# EAGLE board hero_board (EAGLE 9.2.2)
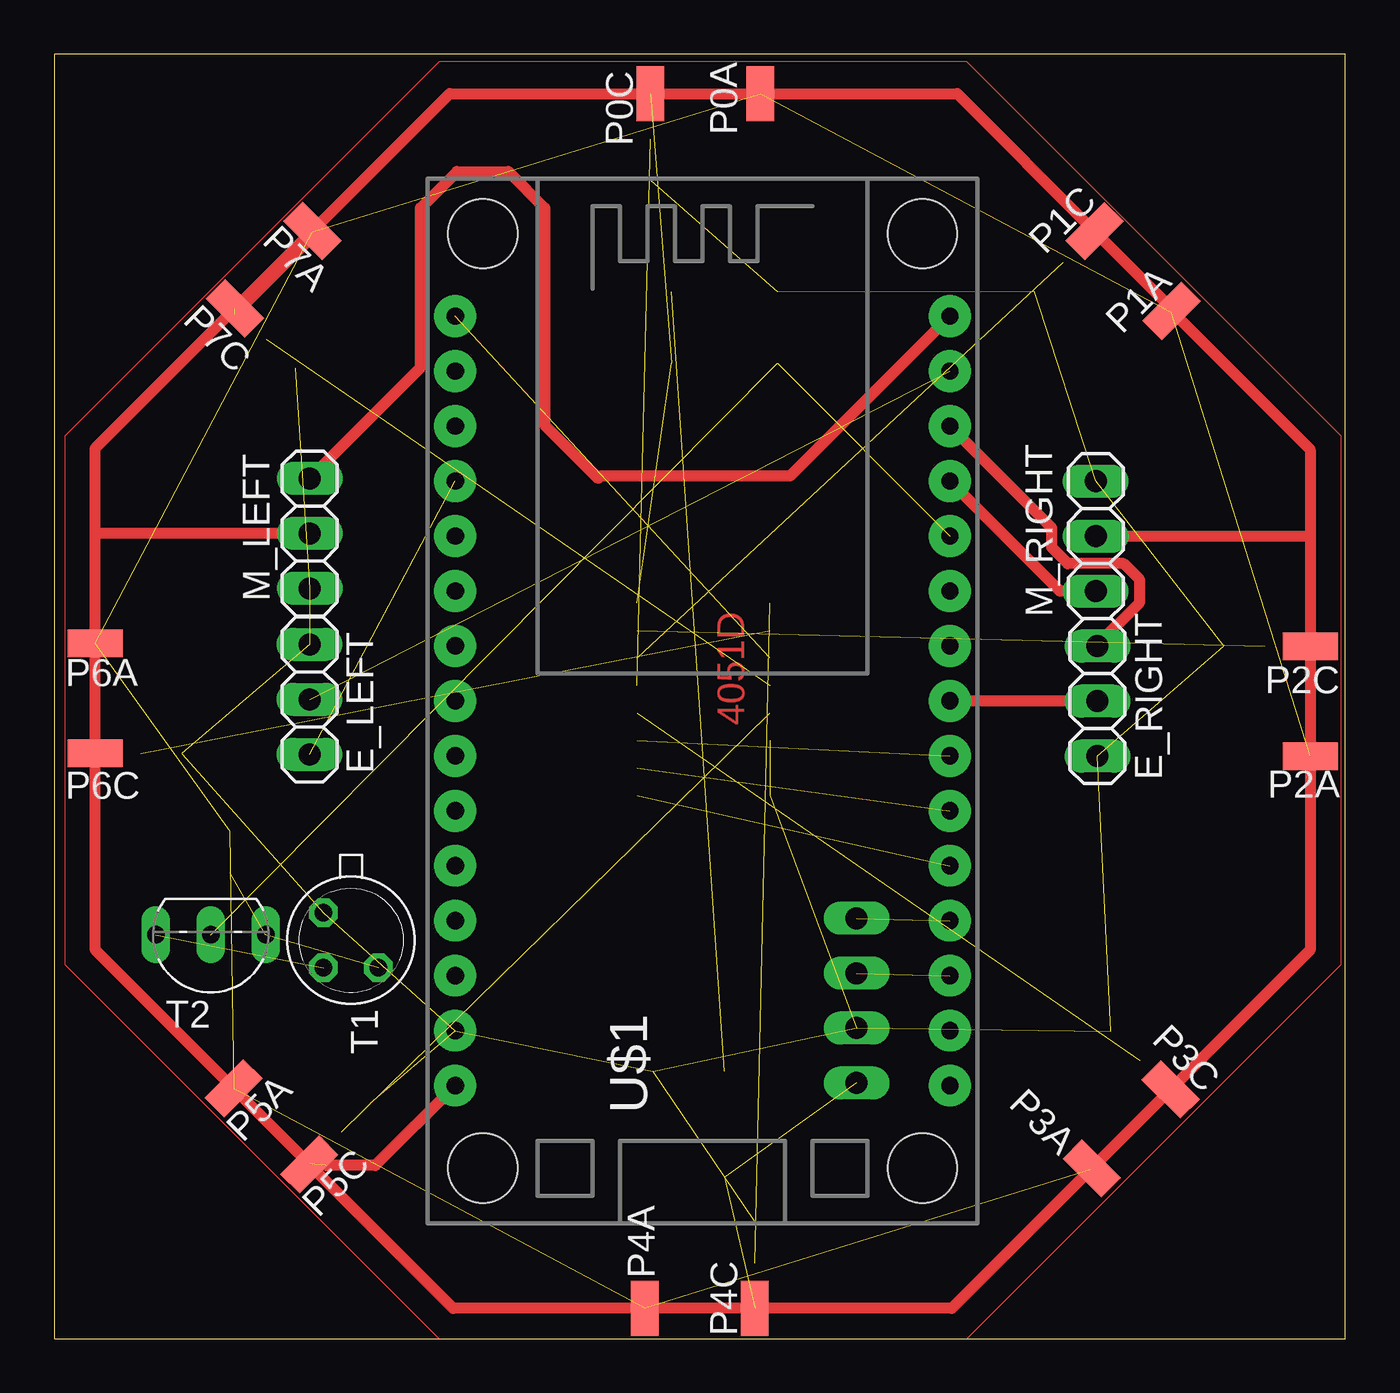
[diagram p0: board, top side]
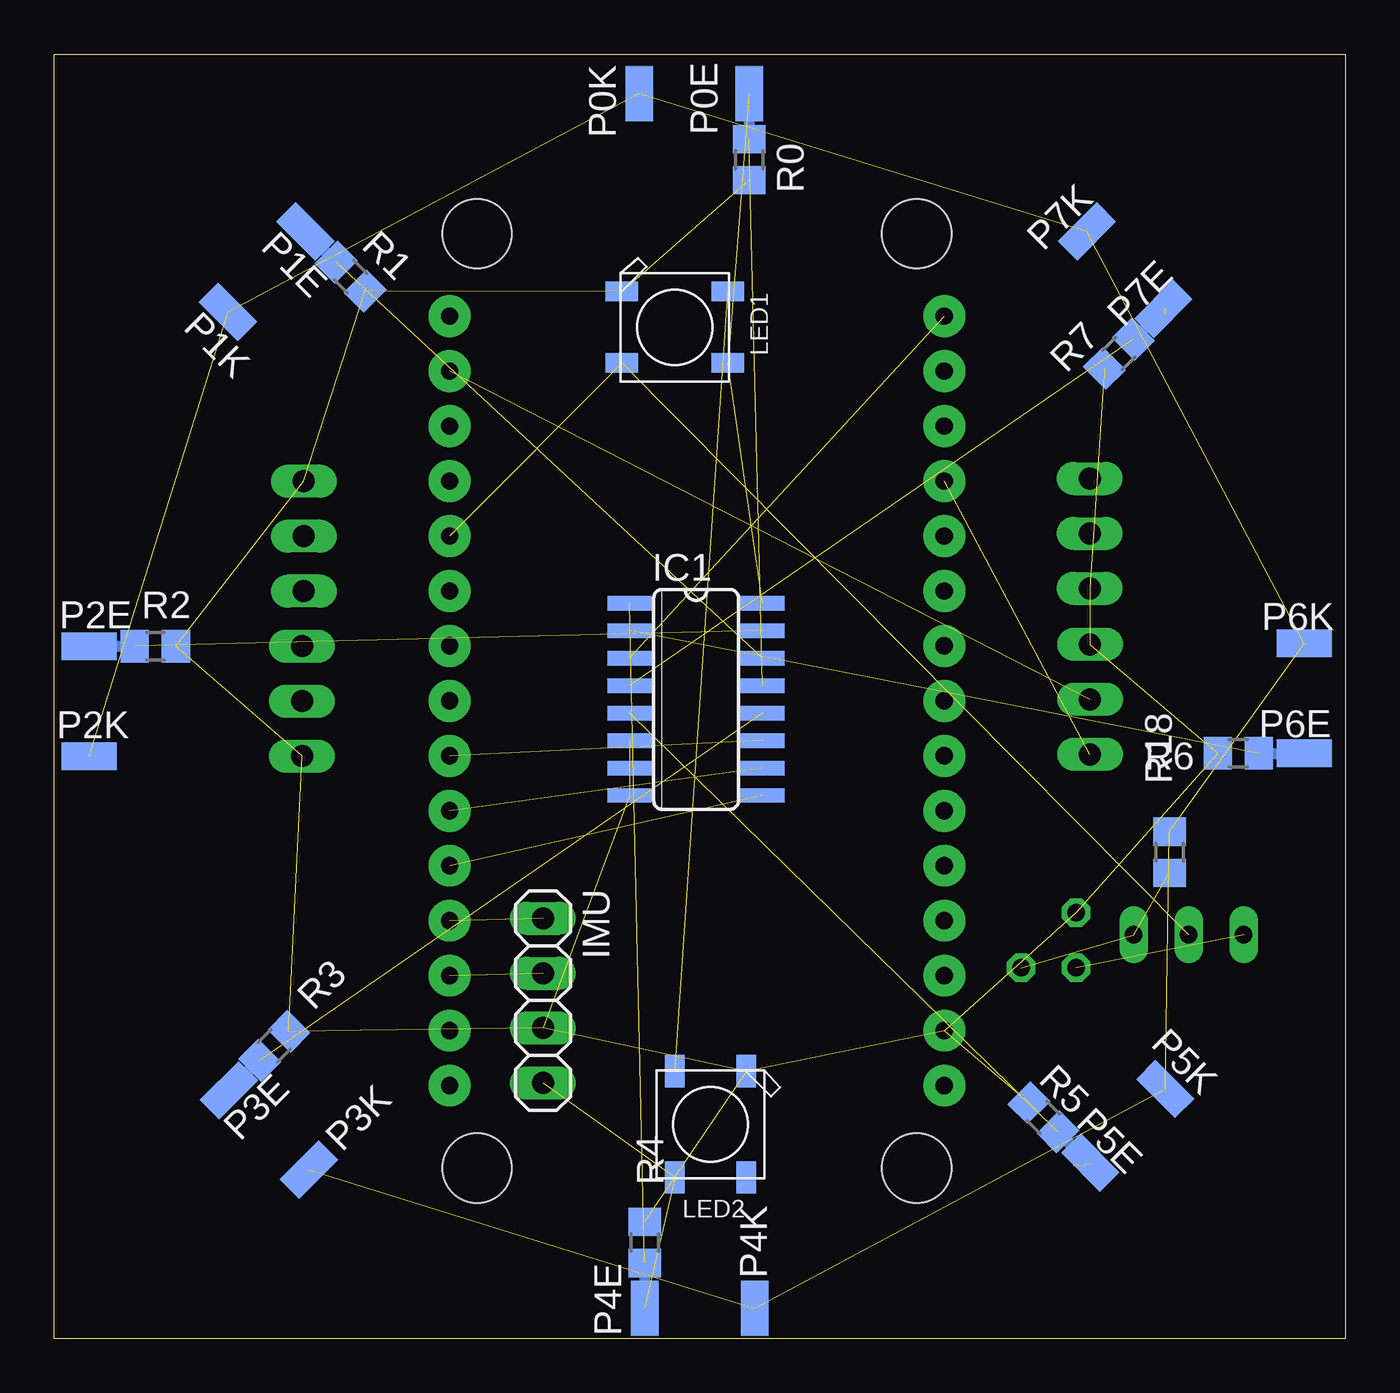
[diagram p1: board, bottom side, seen from below]

Size 59.67 x 59.36 mm. Coordinates in mm from the lower left corner, seen from the top.
Outline: 0,0 59.67,0 59.67,59.36 0,59.36 0,0
Copper layers (1*16): Top 0.035mm / dielectric 1.5mm / Bottom 0.035mm
Design rules "default": minimum track width 6mil, minimum drill 0.35mm, track to track 6mil, track to pad 6mil, pad to pad 6mil, via to via 6mil, smd to smd 6mil, copper to edge 40mil, drill to drill 6mil, minimum pad ring 10mil, minimum via ring 8mil, stop-mask expansion 4mil, vias tented up to drill 0mil, thermal gap 10mil
Net classes: 0 default: width 0.508 mm, drill 0.508 mm, clearance 0.254 mm

## Footprints (pad centres in the part's own frame; a part is rotated, then mirrored left to right if it is on the bottom)
1X03 = drill 1.016 long: 1 -2.54,0; 2 0,0; 3 2.54,0
SO16 = smd 0.66 x 2.032: 1 -4.445,-3.073; 2 -3.175,-3.073; 3 -1.905,-3.073; 4 -0.635,-3.073; 5 0.635,-3.073; 6 1.905,-3.073; 7 3.175,-3.073; 8 4.445,-3.073; 9 4.445,3.073; 10 3.175,3.073; 11 1.905,3.073; 12 0.635,3.073; 13 -0.635,3.073; 14 -1.905,3.073; 15 -3.175,3.073; 16 -4.445,3.073
1X04 = drill 1.016 long: 1 -3.81,0; 2 -1.27,0; 3 1.27,0; 4 3.81,0
WS2812B = smd 1.5 x 0.9: 1-VDD 2.45,-1.65; 2-DOUT 2.45,1.65; 3-GND -2.45,1.65; 4-DIN -2.45,-1.65
SMD1,27-2,54 = smd 1.27 x 2.54: 1 0,0
R0805 = smd 1.3 x 1.5: 1 -0.95,0; 2 0.95,0
TO18 = drill 0.813 octagon: 1 -1.27,-1.27; 2 1.27,-1.27; 3 1.27,1.27
TO92-CBE = drill 0.813 long: B 0,0; C -2.54,0; E 2.54,0
ESP12E_DEVKIT = drill 0.8 pad 1.93: 3V3@0 -11.43,-7.62; 3V3@1 11.43,5.08; 3V3@2 11.43,-17.78; AD0 -11.43,17.78; CLK -11.43,-2.54; CMD -11.43,2.54; D0 11.43,17.78; D1 11.43,15.24; D2 11.43,12.7; D3 11.43,10.16; D4 11.43,7.62; D5 11.43,0; D6 11.43,-2.54; D7 11.43,-5.08; D8 11.43,-7.62; EN -11.43,-10.16; GND@0 -11.43,-5.08; GND@1 -11.43,-15.24; GND@2 11.43,2.54; GND@3 11.43,-15.24; RST -11.43,-12.7; RSV@0 -11.43,15.24; RSV@1 -11.43,12.7; RX 11.43,-10.16; SD0 -11.43,0; SD1 -11.43,5.08; SD2 -11.43,7.62; SD3 -11.43,10.16; TX 11.43,-12.7; VIN -11.43,-17.78 | hole 3.2: -10.16,21.59; 10.16,21.59; 10.16,-21.59; -10.16,-21.59

## Placement (x,y rotation side)
E_LEFT  [1X03]  11.8,29.54 270 top
E_RIGHT  [1X03]  48.22,29.46 90 top
IC1  4051D  [SO16]  30.01,29.54 270 bottom
IMU  [1X04]  37.08,15.62 270 bottom
LED1  WS2812B5050  [WS2812B]  30.99,46.74 0 bottom
LED2  WS2812B5050  [WS2812B]  29.34,9.91 270 bottom
M_LEFT  [1X03]  11.81,37.21 90 top
M_RIGHT  [1X03]  48.13,37.08 270 top
P0A  [SMD1,27-2,54]  32.64,57.53 0 top
P0C  [SMD1,27-2,54]  27.56,57.53 0 top
P0E  [SMD1,27-2,54]  27.56,57.53 0 bottom
P0K  [SMD1,27-2,54]  32.64,57.53 0 bottom
P1A  [SMD1,27-2,54]  51.64,47.5 315 top
P1C  [SMD1,27-2,54]  48.08,51.18 315 top
P1E  [SMD1,27-2,54]  48.06,51.16 45 bottom
P1K  [SMD1,27-2,54]  51.64,47.45 45 bottom
P2A  [SMD1,27-2,54]  58.04,26.92 90 top
P2C  [SMD1,27-2,54]  58.04,32 90 top
P2E  [SMD1,27-2,54]  58.04,32 270 bottom
P2K  [SMD1,27-2,54]  58.04,26.92 270 bottom
P3A  [SMD1,27-2,54]  47.95,7.87 45 top
P3C  [SMD1,27-2,54]  51.6,11.52 45 top
P3E  [SMD1,27-2,54]  51.59,11.48 315 bottom
P3K  [SMD1,27-2,54]  47.89,7.81 315 bottom
P4A  [SMD1,27-2,54]  27.3,1.4 0 top
P4C  [SMD1,27-2,54]  32.39,1.4 0 top
P4E  [SMD1,27-2,54]  32.39,1.4 0 bottom
P4K  [SMD1,27-2,54]  27.3,1.4 0 bottom
P5A  [SMD1,27-2,54]  8.3,11.57 135 top
P5C  [SMD1,27-2,54]  11.79,8.05 135 top
P5E  [SMD1,27-2,54]  11.79,8.13 45 bottom
P5K  [SMD1,27-2,54]  8.32,11.54 45 bottom
P6A  [SMD1,27-2,54]  1.91,32.13 90 top
P6C  [SMD1,27-2,54]  1.91,27.05 90 top
P6E  [SMD1,27-2,54]  1.91,27.05 90 bottom
P6K  [SMD1,27-2,54]  1.91,32.13 90 bottom
P7A  [SMD1,27-2,54]  11.93,51.19 45 top
P7C  [SMD1,27-2,54]  8.35,47.61 45 top
P7E  [SMD1,27-2,54]  8.41,47.59 315 bottom
P7K  [SMD1,27-2,54]  11.94,51.17 315 bottom
R0  [R0805]  27.56,54.48 270 bottom
R1  [R0805]  45.97,49.07 315 bottom
R2  [R0805]  54.99,32 0 bottom
R3  [R0805]  49.49,13.53 45 bottom
R4  [R0805]  32.39,4.45 90 bottom
R5  [R0805]  13.95,10.23 135 bottom
R6  [R0805]  4.95,27.05 180 bottom
R7  [R0805]  10.47,45.51 225 bottom
R18  [R0805]  8.13,22.48 90 bottom
T1  2N2222  [TO18]  13.72,18.41 270 top
T2  [TO92-CBE]  7.24,18.67 180 top
U$1  ESP12E_DEVKIT  [ESP12E_DEVKIT]  29.96,29.47 0 top

## Library data of the parts
E_LEFT E_RIGHT IMU M_LEFT M_RIGHT = pinhead
IC1 = 40xx
LED1 LED2 = adafruit
P0A P0C P0E P0K P1A P1C P1E P1K P2A P2C P2E P2K P3A P3C P3E P3K P4A P4C P4E P4K P5A P5C P5E P5K P6A P6C P6E P6K P7A P7C P7E P7K = wirepad
R0 R1-R7 R18 = resistor
T1 T2 = transistor
U$1 = ESP12E_DEVKIT

## Nets
AD0: IC1.3 U$1.AD0
E_LEFT_A: E_LEFT.3 U$1.SD3
E_LEFT_B: E_LEFT.2 U$1.D1
E_RIGHT_A: E_RIGHT.3 U$1.D2
E_RIGHT_B: E_RIGHT.2 U$1.D5
EM: P0K.1 P1K.1 P2K.1 P3K.1 P4K.1 P5K.1 P6K.1 P7K.1 R18.2
EM_ENABLE: LED1.4-DIN T2.B U$1.D4
GND: E_LEFT.1 E_RIGHT.1 IC1.6 IC1.8 IMU.3 LED1.3-GND LED2.3-GND M_LEFT.1 M_RIGHT.1 R0.2 R1.2 R2.2 R3.2 R4.2 R5.2 R6.2 R7.2 T1.1 U$1.GND@1
M_LEFT_PWM: M_LEFT.3 U$1.D0
M_RIGHT_PWM: M_RIGHT.3 U$1.D3
MUX_A: IC1.11 U$1.D6
MUX_B: IC1.10 U$1.D7
MUX_C: IC1.9 U$1.D8
MUX_X0: IC1.13 P0E.1 R0.1
MUX_X1: IC1.14 P1E.1 R1.1
MUX_X2: IC1.15 P2E.1 R2.1
MUX_X3: IC1.12 P3E.1 R3.1
MUX_X4: IC1.1 P4E.1 R4.1
MUX_X5: IC1.5 P5E.1 R5.1
MUX_X6: IC1.2 P6E.1 R6.1
MUX_X7: IC1.4 P7E.1 R7.1
N$1: T1.2 T2.E
N$2: R18.1 T1.3 T2.C
N$3: LED1.2-DOUT LED2.4-DIN
SCL_TX: IMU.2 U$1.TX
SDA_RX: IMU.1 U$1.RX
VCC: IC1.16 IMU.4 LED1.1-VDD LED2.1-VDD M_LEFT.2 M_RIGHT.2 P0A.1 P0C.1 P1A.1 P1C.1 P2A.1 P2C.1 P3A.1 P3C.1 P4A.1 P4C.1 P5A.1 P5C.1 P6A.1 P6C.1 P7A.1 P7C.1 U$1.VIN
VEE: IC1.7

## Tracks (layer width: path | path; a pad name or v marks a point on that pad's centre or on a via)
AD0  (1 unrouted)
E_LEFT_A  (1 unrouted)
E_LEFT_B  (1 unrouted)
E_RIGHT_A
  Top 0.508: U$1.D2 46.1,37.47 46.1,36.56 46.84,35.81 49.42,35.81 50.16,35.07 50.16,34.02 48.22,32.07 E_RIGHT.3
E_RIGHT_B
  Top 0.508: E_RIGHT.2 41.4,29.46 U$1.D5
EM  (8 unrouted)
EM_ENABLE  (2 unrouted)
GND  (18 unrouted)
M_LEFT_PWM
  Top 0.508: M_LEFT.3 16.93,44.87 16.93,52.25 18.62,53.93 20.99,53.93 22.67,52.25 22.67,42.22 25.15,39.75 25.27,39.88 34.02,39.88 U$1.D0
M_RIGHT_PWM
  Top 0.508: M_RIGHT.3 46.48,34.54 U$1.D3
MUX_A  (1 unrouted)
MUX_B  (1 unrouted)
MUX_C  (1 unrouted)
MUX_X0  (1 unrouted)
  Bottom 0.508: P0E.1 R0.1
MUX_X1  (1 unrouted)
  Bottom 0.508: P1E.1 R1.1 | R1.1
MUX_X2  (1 unrouted)
  Bottom 0.508: P2E.1 R2.1
MUX_X3  (1 unrouted)
  Bottom 0.508: 51.01,12.24 51.01,12.06 P3E.1 50.21,12.86 R3.1
MUX_X4  (1 unrouted)
  Bottom 0.508: R4.1 P4E.1
MUX_X5  (1 unrouted)
  Bottom 0.508: R5.1 11.85,8.13 P5E.1
MUX_X6  (1 unrouted)
  Bottom 0.508: R6.1 P6E.1
MUX_X7  (1 unrouted)
  Bottom 0.508: P7E.1 8.41,47.56 R7.1
N$1  (1 unrouted)
N$2  (2 unrouted)
N$3  (1 unrouted)
N$4
  Top 0: 17.78,0 42.18,0 59.48,17.3 59.48,41.7 42.18,59 17.78,59 0.48,41.7 0.48,17.3 | 0.48,17.3 17.78,0 | 0.48,17.3 17.78,0
SCL_TX  (1 unrouted)
SDA_RX  (1 unrouted)
VCC  (6 unrouted)
  Top 0.508: 48.01,51.18 P1C.1 | P3A.1 | 1.91,37.08 P6A.1 P6C.1 1.91,17.96 P5A.1 11.79,8.08 P5C.1 18.45,1.4 P4A.1 P4C.1 41.48,1.4 P3A.1 | 1.91,37.08 1.91,41.16 P7C.1 P7A.1 18.28,57.53 P0C.1 P0A.1 41.73,57.53 P1C.1 | 8.36,47.35 11.93,50.93 | P1C.1 51.64,47.62 P1A.1 58.04,41.09 58.04,37.08 | 58.04,37.08 P2C.1 P2A.1 58.04,17.96 P3C.1 P3A.1 | U$1.VIN 14.84,8 12.57,8 | M_LEFT.2 2.03,37.21 1.91,37.08 | M_RIGHT.2 58.04,37.08